# EAGLE board RFBoardLayoutGen0_v03.7_1_2 (EAGLE 9.4.1), part 1 of 2
AUTHOR: Kirchschlager Raimund
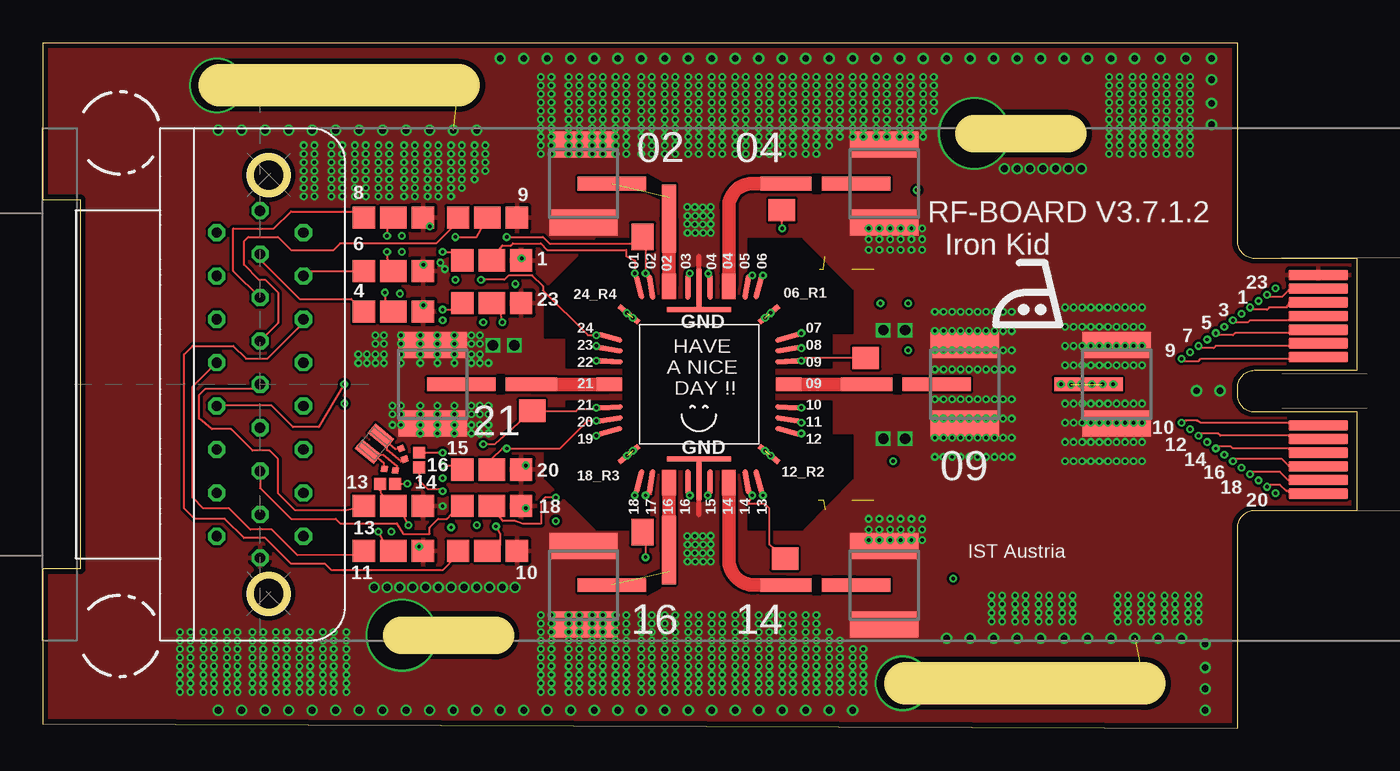
[diagram p0: board, top side]
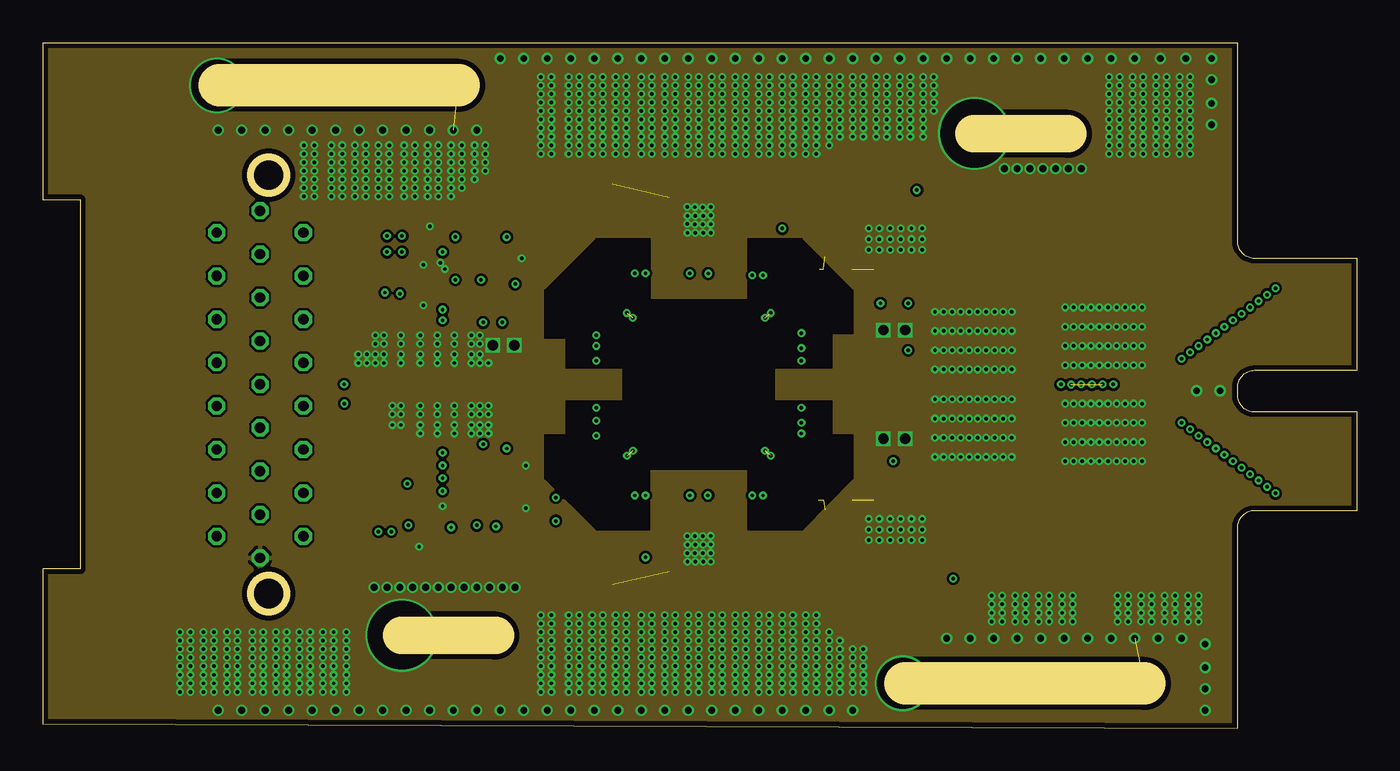
[diagram p1: board, inner layer Route2]
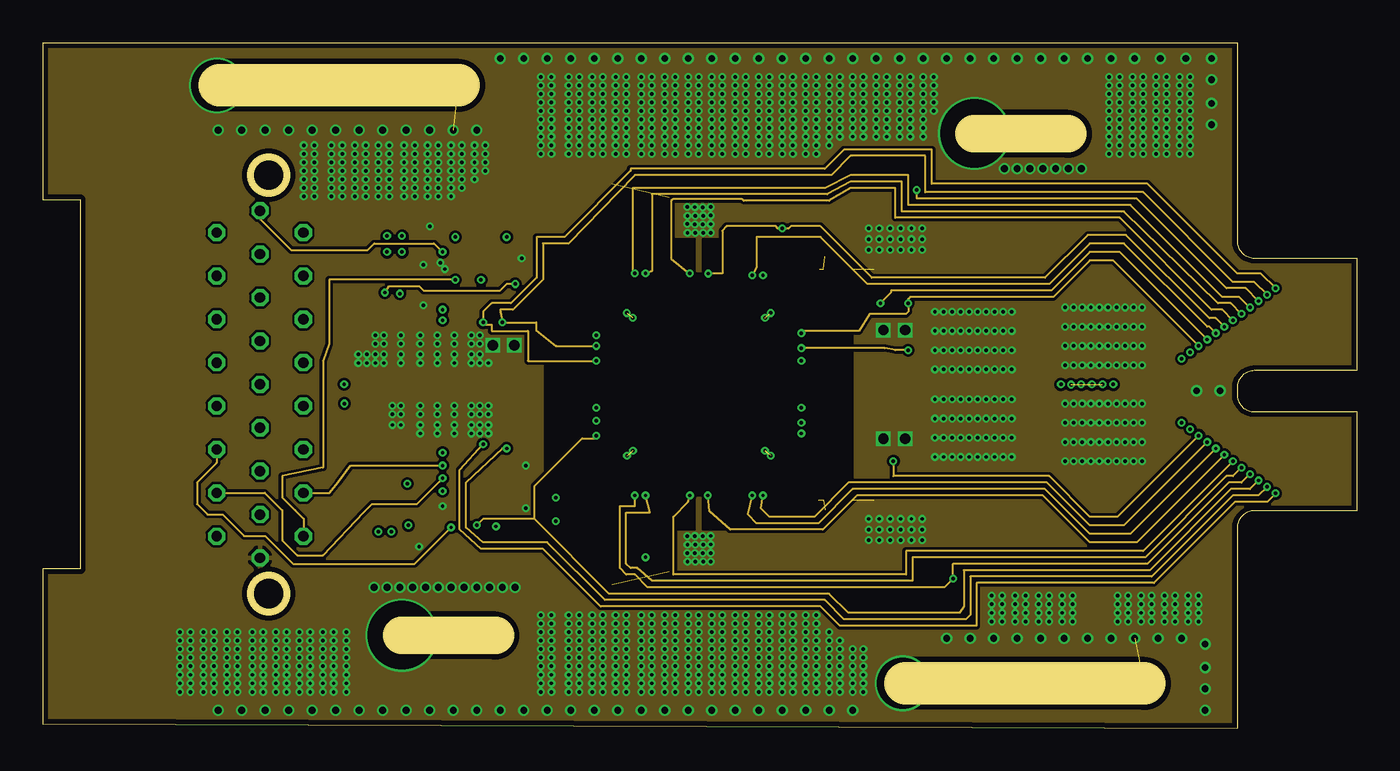
[diagram p2: board, inner layer Route3]
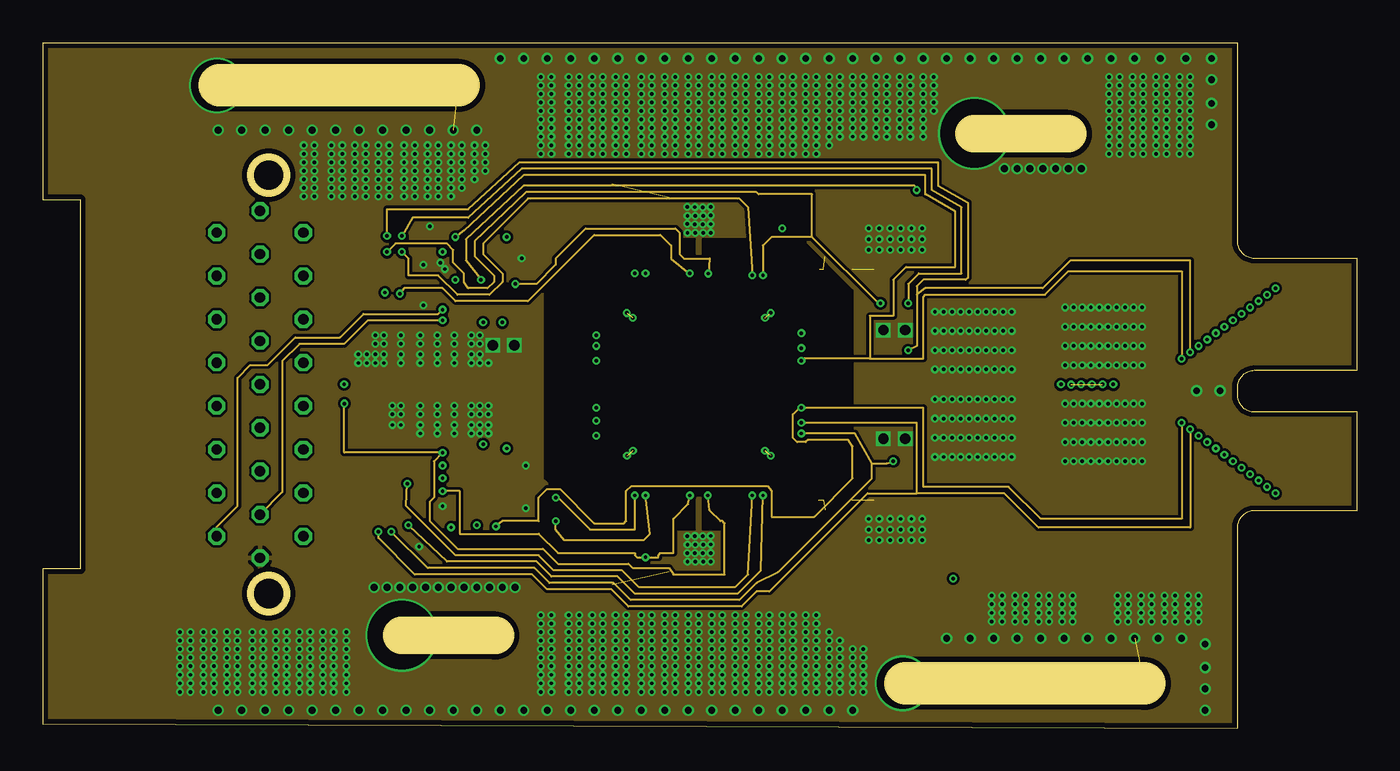
[diagram p3: board, inner layer Route14]
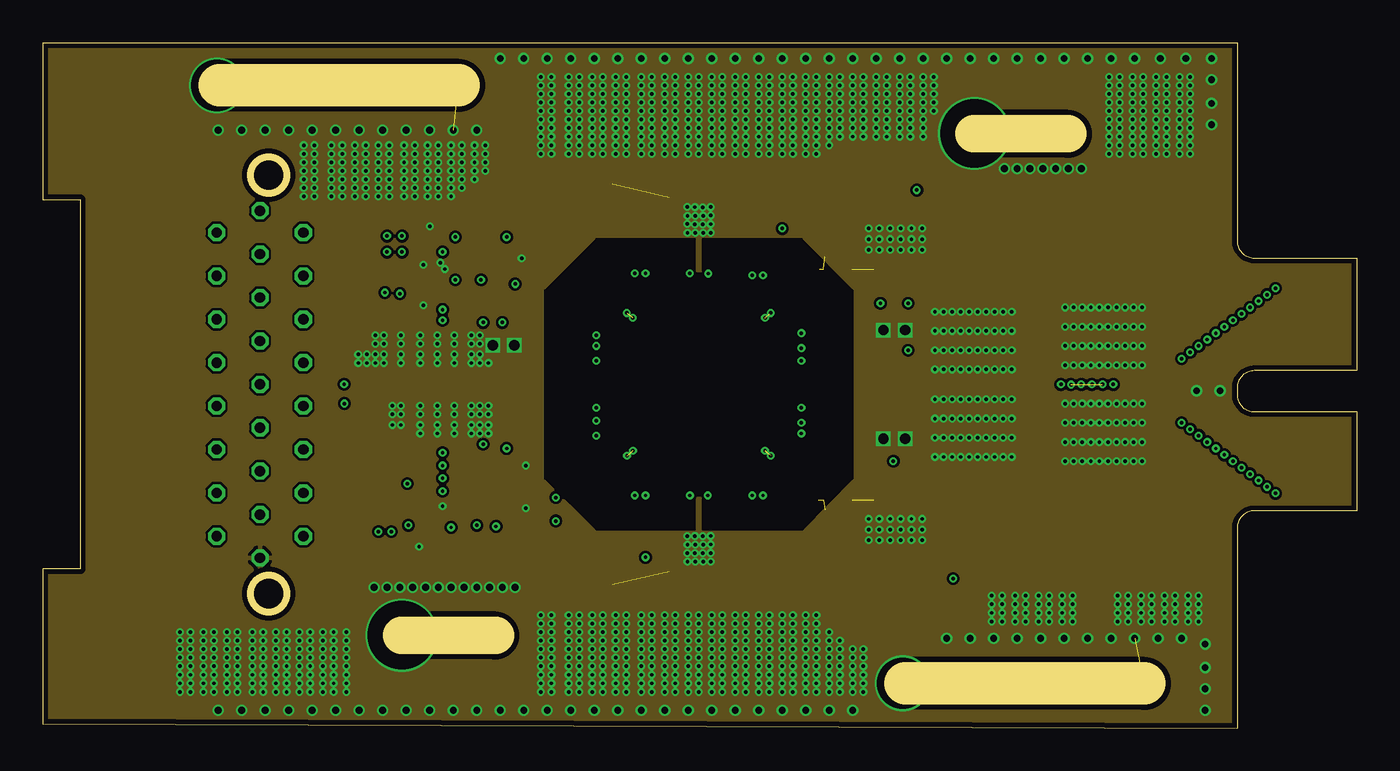
[diagram p4: board, inner layer Route15]
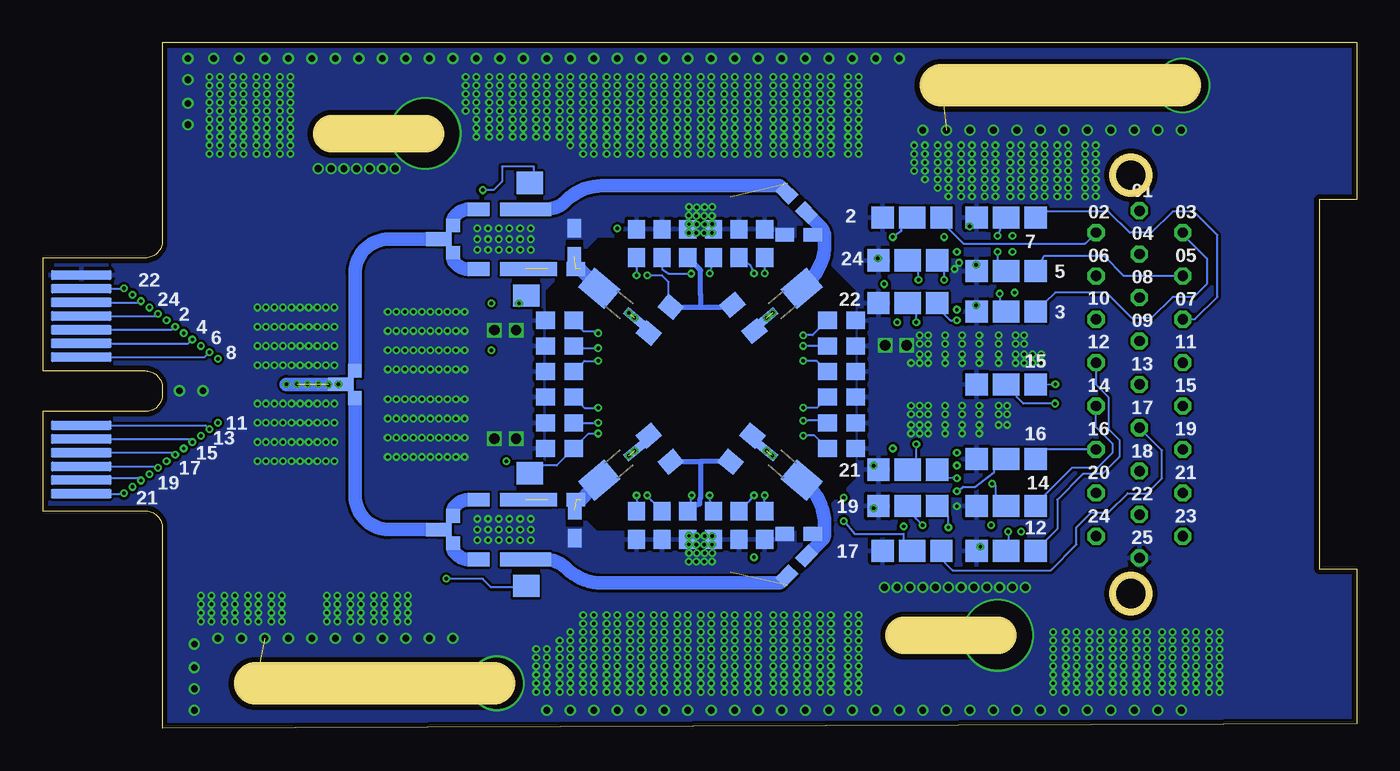
[diagram p5: board, bottom side, seen from below]

Size 76.9 x 40.12 mm. Coordinates in mm from the lower left corner, seen from the top.
Outline: 60,34.83 54.5,34.83
Outline: 24.35,37.62 10.35,37.62
Outline: 64.47,2.62 50.47,2.62
Outline: 26.5,5.43 21,5.43
Outline: 60,34.8 54.5,34.8
Outline: 0,40.12 0,30.93 2.2,30.93 2.2,9.32 0,9.32 0,0.25 69.9,0 69.9,11.72 arc-90 70.9,12.72 76.9,12.72 76.9,18.52 70.9,18.52 arc-90 69.9,19.52 69.9,19.93 arc-90 70.9,20.93 76.9,20.93 76.9,27.52 70.9,27.52 arc-90 69.9,28.52 69.9,40.12 0,40.12
Outline: circle at 13.22,7.88 radius 1.06
Outline: circle at 13.22,32.38 radius 1.06
Copper layers (1+2+3*14+15+16): Top 0.035mm / dielectric 0.4mm / Route2 0.035mm / dielectric 0.2mm / Route3 0.035mm / dielectric 0.2mm / Route14 0.035mm / dielectric 0.2mm / Route15 0.035mm / dielectric 0.4mm / Bottom 0.035mm
Design rules "PCB-POOL HighSpec_ML6+ *": minimum track width 0.125mm, minimum drill 0.2mm, track to track 0.125mm, track to pad 0.125mm, pad to pad 0.125mm, via to via 0.125mm, smd to smd 0.125mm, copper to edge 0.3mm, drill to drill 0.2mm, minimum pad ring 0.2mm, minimum via ring 0.125mm, stop-mask expansion 0.065mm, vias tented up to drill 0.3mm, thermal gap 0.2mm
Net classes: 0 GND: clearance 0.15 mm; 1 RF: width 0.8 mm, clearance 0.5 mm; 2 RF2: width 0.8 mm, clearance 0.2 mm
tRestrict: area 35.4,30.9 to 36.2,32.5; area 35.4,7.8 to 36.2,9.3; area 45.1,7.8 to 45.5,9; area 45.1,31.3 to 45.5,32.5; area 49.8,19.5 to 50.2,20.7; area 26.6,19.5 to 27,20.7

## Footprints (pad centres in the part's own frame; a part is rotated, then mirrored left to right if it is on the bottom)
BIAS_TEE_DOWN_0603_V02 = smd 1 x 0.8: HF 2.27,0 | smd 1.55 x 1.3: LF -0.05,1.55 | smd 4 x 0.8: OUT 1,0
BIAS_TEE_UP_0603 = smd 1.3 x 0.8: HF 3.25,0 | smd 1.55 x 1.3: LF 0.25,-1.55 | smd 3 x 0.8: OUT 0.5,0
BIAS_TEE_DOWN_0603 = smd 1.3 x 0.8: HF 3.25,0 | smd 1.55 x 1.3: LF 0.45,1.55 | smd 3 x 0.8: OUT 0.5,0
BIAS_TEE_UP_0603_V02 = smd 1 x 0.8: HF 2.27,0 | smd 1.55 x 1.3: LF -0.05,-1.55 | smd 4 x 0.8: OUT 1,0
25_SOCKET_M83513/13-D_V2 = drill 0.6 octagon: 01 10.16,0; 02 8.89,-2.54; 03 8.89,2.54; 04 7.62,0; 05 6.35,2.54; 06 6.35,-2.54; 07 3.81,2.54; 08 5.08,0; 09 2.54,0; 10 3.81,-2.54; 11 1.27,2.54; 12 1.27,-2.54; 13 0,0; 14 -1.27,-2.54; 15 -1.27,2.54; 16 -3.81,-2.54; 17 -2.54,0; 18 -5.08,0; 19 -3.81,2.54; 20 -6.35,-2.54; 21 -6.35,2.54; 22 -7.62,0; 23 -8.89,2.54; 24 -8.89,-2.54; 25 -10.16,0
L_MATCH = smd 2 x 1.5: IN 1.5,0 | smd 1.3 x 0.5: OUT -1.15,0
LP-FILTER/1_STAGE/OS/0603_TOP = smd 1.3 x 1.3: $1 -1.6,0.01; $6 1.85,0.01 | smd 1.55 x 1.3: $4 0.125,0.01
LP-FILTER/1_STAGE/OS/0603_BOTTOM = smd 1.3 x 1.3 bottom: $1 -1.6,0.01; $6 1.85,0.01 | smd 1.55 x 1.3 bottom: $4 0.125,0.01
SMP_STRAIGHT_MINI_WIDE = smd 0.8 x 4: 1 0,1.653 | smd 1.524 x 4: 2@1 -2.292,0; 2@2 2.292,0
TP07SQ = smd 0.7 x 0.7: TP 0,0
MEC8-113-02-L-D-RA1 = smd 0.6 x 3.5: 1 6.4,0.15; 3 5.6,0.15; 5 4.8,0.15; 7 4,0.15; 9 3.2,0.15; 11 2.4,0.15; 13 -1.6,0.15; 15 -2.4,0.15; 17 -3.2,0.15; 19 -4,0.15; 21 -4.8,0.15; 23 -5.6,0.15; 25 -6.4,0.15 | smd 0.6 x 3.5 bottom: 2 6.4,0.15; 4 5.6,0.15; 6 4.8,0.15; 8 4,0.15; 10 3.2,0.15; 12 2.4,0.15; 14 -1.6,0.15; 16 -2.4,0.15; 18 -3.2,0.15; 20 -4,0.15; 22 -4.8,0.15; 24 -5.6,0.15; 26 -6.4,0.15
RX-BR_V1 = smd 0.406 x 0.406 rotated 105: I$1 -0.02,1.08; U$1 0.63,1.23 | smd 0.406 x 0.406 rotated 165: I$2 1.08,-0.02; U$2 1.23,0.63 | smd 1.422 x 0.711 rotated 45: P$2 -0.02,-0.87; P$3 -0.87,-0.02
T_JUNCTION_0.3MM = smd 0.8 x 1.5 bottom: P$1 0,-0.81 | smd 0.8 x 0.8 bottom: P$2 -0.8,0.02; P$3 0.8,0.02 | smd 1 x 0.32 bottom: P$4 0,-0.22
24DC+10RF/400MU-PADS/0.7X0.7_V3.0 = smd 1.5 x 0.3 rotated 105: DC$01 -3.5,5.7 | smd 1.5 x 0.3 rotated 99: DC§02 -2.8,5.7 | smd 0.3 x 1.5: DC§03 -0.65,5.7; DC§04 0.65,5.7; DC§15 0.65,-5.7; DC§16 -0.65,-5.7 | smd 1.5 x 0.3 rotated 81: DC§05 2.8,5.7 | smd 1.5 x 0.3 rotated 75: DC§06 3.5,5.7 | smd 1.5 x 0.3 rotated 195: DC§07 5.2,2.75 | smd 1.5 x 0.3 rotated 189: DC§08 5.2,2.05 | smd 1.5 x 0.3 rotated 183: DC§09 5.2,1.35 | smd 1.5 x 0.3 rotated 177: DC§10 5.2,-1.35 | smd 1.5 x 0.3 rotated 171: DC§11 5.2,-2.05 | smd 1.5 x 0.3 rotated 165: DC§12 5.2,-2.75 | smd 1.5 x 0.3 rotated 285: DC§13 3.5,-5.7 | smd 1.5 x 0.3 rotated 279: DC§14 2.8,-5.7 | smd 1.5 x 0.3 rotated 261: DC§17 -2.8,-5.7 | smd 1.5 x 0.3 rotated 255: DC§18 -3.5,-5.7 | smd 1.5 x 0.3 rotated 15: DC§19 -5.2,-2.75 | smd 1.5 x 0.3 rotated 9: DC§20 -5.2,-2.05 | smd 1.5 x 0.3 rotated 3: DC§21 -5.2,-1.35 | smd 1.5 x 0.3 rotated 357: DC§22 -5.2,1.35 | smd 1.5 x 0.3 rotated 351: DC§23 -5.2,2.05 | smd 1.5 x 0.3 rotated 345: DC§24 -5.2,2.75 | smd 0.3 x 2: GND$1 0,5.75; GND$2 0,-5.75 | smd 1 x 0.3: GND$3 -1.375,4.375; GND$4 1.375,4.375; GND$5 1.375,-4.375; GND$6 -1.375,-4.375 | smd 3 x 0.3: GND$7 -0.105,4.375; GND$8 -0.105,-4.375 | smd 0.3 x 1: GND$9 0,-4.75; GND$10 0,4.75 | smd 0.8 x 1.5: RF$02_G1 -1.75,5.75; RF$04_G2 1.75,5.75; RF$14_G4 1.75,-5.75; RF$16_G5 -1.75,-5.75 | smd 1.5 x 0.3 rotated 40: RF$06_R1 4.1,4.1; RF$18_R3 -4.1,-4.1 | smd 1.5 x 0.8: RF$09_G3 5.25,0; RF$21_G6 -5.25,0 | smd 1.5 x 0.3 rotated 140: RF$12_R2 4.1,-4.1; RF$24_R4 -4.1,4.1
LP-FILTER/CAPACITOR/0603_BOTTOM = smd 1.1 x 0.8 bottom: IN -0.825,0; OUT 0.825,0
LP-FILTER/VARACTOR_V2 = smd 1 x 1.2 bottom: OUT 1,0; OUT1 -1,0
LP-FILTER/CAPACITOR/0603_BOTTOM_V2 = smd 1.1 x 1 bottom: IN -0.825,0; OUT 0.825,0

## Placement (x,y rotation side)
B$1  BIASTEEDOWN2  [BIAS_TEE_DOWN_0603_V02]  36.65,28.82 90 top
B$2  BIASTEEUP1  [BIAS_TEE_UP_0603]  43,31.88 0 top
B$3  BIASTEEDOWN1  [BIAS_TEE_DOWN_0603]  47.71,20.12 0 top
B$4  BIASTEEDOWN1  [BIAS_TEE_DOWN_0603]  43,8.38 0 top
B$5  BIASTEEUP2  [BIAS_TEE_UP_0603_V02]  36.65,11.43 270 top
B$6  BIASTEEDOWN1  [BIAS_TEE_DOWN_0603]  29.09,20.12 180 top
B$7  BIASTEEUP1  [BIAS_TEE_UP_0603]  48.15,30.38 180 bottom
B$8  BIASTEEDOWN1  [BIAS_TEE_DOWN_0603]  48.15,26.88 180 bottom
B$9  BIASTEEUP1  [BIAS_TEE_UP_0603]  48.15,13.38 180 bottom
B$10  BIASTEEDOWN1  [BIAS_TEE_DOWN_0603]  48.15,9.88 180 bottom
E$2  [25_SOCKET_M83513/13-D_V2]  12.71,20.12 90 top
L$1  L_MATCH  [L_MATCH]  33.62,24.77 40 bottom
L$2  L_MATCH  [L_MATCH]  43.17,24.77 140 bottom
L$3  L_MATCH  [L_MATCH]  43.17,15.47 220 bottom
L$4  L_MATCH  [L_MATCH]  33.63,15.47 320 bottom
LP$1  LP-FILTER/1-STAGETOP  [LP-FILTER/1_STAGE/OS/0603_TOP]  20.4,29.88 0 top
LP$2  LP-FILTER/1-STAGETOP  [LP-FILTER/1_STAGE/OS/0603_TOP]  20.4,26.75 0 top
LP$3  LP-FILTER/1-STAGETOP  [LP-FILTER/1_STAGE/OS/0603_TOP]  20.4,24.38 0 top
LP$4  LP-FILTER/1-STAGETOP  [LP-FILTER/1_STAGE/OS/0603_TOP]  20.4,20.12 180 bottom
LP$5  LP-FILTER/1-STAGETOP  [LP-FILTER/1_STAGE/OS/0603_TOP]  20.4,13 0 top
LP$6  LP-FILTER/1-STAGETOP  [LP-FILTER/1_STAGE/OS/0603_TOP]  20.4,10.38 0 top
LP$7  LP-FILTER/1-STAGEBOT  [LP-FILTER/1_STAGE/OS/0603_BOTTOM]  20.4,29.88 0 top
LP$8  LP-FILTER/1-STAGEBOT  [LP-FILTER/1_STAGE/OS/0603_BOTTOM]  20.4,26.75 0 top
LP$9  LP-FILTER/1-STAGEBOT  [LP-FILTER/1_STAGE/OS/0603_BOTTOM]  20.4,24.38 0 top
LP$10  LP-FILTER/1-STAGEBOT  [LP-FILTER/1_STAGE/OS/0603_BOTTOM]  25.9,29.88 0 top
LP$11  LP-FILTER/1-STAGEBOT  [LP-FILTER/1_STAGE/OS/0603_BOTTOM]  25.9,10.38 0 top
LP$12  LP-FILTER/1-STAGEBOT  [LP-FILTER/1_STAGE/OS/0603_BOTTOM]  20.4,15.75 0 top
LP$13  LP-FILTER/1-STAGEBOT  [LP-FILTER/1_STAGE/OS/0603_BOTTOM]  20.4,13 0 top
LP$14  LP-FILTER/1-STAGEBOT  [LP-FILTER/1_STAGE/OS/0603_BOTTOM]  20.4,10.38 0 top
LP$15  LP-FILTER/1-STAGETOP  [LP-FILTER/1_STAGE/OS/0603_TOP]  25.9,29.88 0 top
LP$16  LP-FILTER/1-STAGETOP  [LP-FILTER/1_STAGE/OS/0603_TOP]  26.15,27.38 0 top
LP$17  LP-FILTER/1-STAGETOP  [LP-FILTER/1_STAGE/OS/0603_TOP]  26.15,24.88 0 top
LP$18  LP-FILTER/1-STAGETOP  [LP-FILTER/1_STAGE/OS/0603_TOP]  26.15,15.12 0 top
LP$19  LP-FILTER/1-STAGETOP  [LP-FILTER/1_STAGE/OS/0603_TOP]  26.15,13 0 top
LP$20  LP-FILTER/1-STAGETOP  [LP-FILTER/1_STAGE/OS/0603_TOP]  25.9,10.38 0 top
LP$21  LP-FILTER/1-STAGEBOT  [LP-FILTER/1_STAGE/OS/0603_BOTTOM]  26.15,27.38 0 top
LP$22  LP-FILTER/1-STAGEBOT  [LP-FILTER/1_STAGE/OS/0603_BOTTOM]  26.15,24.88 0 top
LP$23  LP-FILTER/1-STAGEBOT  [LP-FILTER/1_STAGE/OS/0603_BOTTOM]  26.15,15.12 0 top
LP$24  LP-FILTER/1-STAGEBOT  [LP-FILTER/1_STAGE/OS/0603_BOTTOM]  26.15,13 0 top
S$1  MC-921WIDE  [SMP_STRAIGHT_MINI_WIDE]  22.84,20.12 270 top
S$2  MC-921WIDE  [SMP_STRAIGHT_MINI_WIDE]  31.65,8.38 270 top
S$3  MC-921WIDE  [SMP_STRAIGHT_MINI_WIDE]  49.25,8.38 90 top
S$4  MC-921WIDE  [SMP_STRAIGHT_MINI_WIDE]  53.96,20.12 90 top
S$5  MC-921WIDE  [SMP_STRAIGHT_MINI_WIDE]  62.85,20.12 90 top
S$6  MC-921WIDE  [SMP_STRAIGHT_MINI_WIDE]  49.25,31.88 90 top
S$7  MC-921WIDE  [SMP_STRAIGHT_MINI_WIDE]  31.65,31.88 270 top
TP1  TPTP07SQ  [TP07SQ]  22.02,16.12 0 top
TP2  TPTP07SQ  [TP07SQ]  22.02,15.25 0 top
TP3  TPTP07SQ  [TP07SQ]  20.62,14.31 0 top
TP4  TPTP07SQ  [TP07SQ]  19.74,14.31 90 top
U$1  MEC8-113-02-L-D-RA1MBRD  [MEC8-113-02-L-D-RA1]  74.5,20.12 270 top
U$2  TEMPSENS  [RX-BR_V1]  19.9,16.25 275.6 top
U$3  TJUNCTION  [T_JUNCTION_0.3MM]  52.9,28.62 90 top
U$4  TJUNCTION  [T_JUNCTION_0.3MM]  58.65,20.12 90 top
U$5  TJUNCTION  [T_JUNCTION_0.3MM]  52.9,11.62 90 top
U$6  24DC+10RF_V3.0  [24DC+10RF/400MU-PADS/0.7X0.7_V3.0]  38.4,20.12 0 top
U$7  LP-FILTER/CAPACITOR/0603THIN  [LP-FILTER/CAPACITOR/0603_BOTTOM]  32.65,28.88 0 top
U$8  LP-FILTER/CAPACITOR/0603THIN  [LP-FILTER/CAPACITOR/0603_BOTTOM]  32.65,11.38 0 top
U$9  LP-FILTER/CAPACITOR/0603THIN  [LP-FILTER/CAPACITOR/0603_BOTTOM]  45.77,11.94 270 top
U$10  LP-FILTER/CAPACITOR/0603THIN  [LP-FILTER/CAPACITOR/0603_BOTTOM]  45.79,28.44 90 top
U$11  LP-FILTER/VARACTOR_V2  [LP-FILTER/VARACTOR_V2]  36.01,16.36 130 top
U$12  LP-FILTER/VARACTOR_V2  [LP-FILTER/VARACTOR_V2]  40.79,16.36 50 top
U$13  LP-FILTER/VARACTOR_V2  [LP-FILTER/VARACTOR_V2]  40.79,23.89 310 top
U$14  LP-FILTER/VARACTOR_V2  [LP-FILTER/VARACTOR_V2]  35.89,24.02 230 top
U$15  LP-FILTER/CAPACITOR/0603NORMAL  [LP-FILTER/CAPACITOR/0603_BOTTOM_V2]  39.15,28.38 270 top
U$16  LP-FILTER/CAPACITOR/0603NORMAL  [LP-FILTER/CAPACITOR/0603_BOTTOM_V2]  39.15,11.88 90 top
U$17  LP-FILTER/CAPACITOR/0603THIN  [LP-FILTER/CAPACITOR/0603_BOTTOM]  32.77,30.75 45 top
U$18  LP-FILTER/CAPACITOR/0603THIN  [LP-FILTER/CAPACITOR/0603_BOTTOM]  32.77,9.5 315 top
U$19  LP-FILTER/CAPACITOR/0603THIN  [LP-FILTER/CAPACITOR/0603_BOTTOM]  46.52,26.88 0 top
U$20  LP-FILTER/CAPACITOR/0603THIN  [LP-FILTER/CAPACITOR/0603_BOTTOM]  46.52,13.38 0 top
U$21  LP-FILTER/CAPACITOR/0603NORMAL  [LP-FILTER/CAPACITOR/0603_BOTTOM_V2]  34.65,28.38 270 top
U$22  LP-FILTER/CAPACITOR/0603NORMAL  [LP-FILTER/CAPACITOR/0603_BOTTOM_V2]  36.15,28.38 270 top
U$23  LP-FILTER/CAPACITOR/0603NORMAL  [LP-FILTER/CAPACITOR/0603_BOTTOM_V2]  37.65,28.38 270 top
U$24  LP-FILTER/CAPACITOR/0603NORMAL  [LP-FILTER/CAPACITOR/0603_BOTTOM_V2]  40.65,28.38 270 top
U$26  LP-FILTER/CAPACITOR/0603NORMAL  [LP-FILTER/CAPACITOR/0603_BOTTOM_V2]  42.15,28.38 270 top
U$27  LP-FILTER/CAPACITOR/0603NORMAL  [LP-FILTER/CAPACITOR/0603_BOTTOM_V2]  46.65,23.88 180 top
U$28  LP-FILTER/CAPACITOR/0603NORMAL  [LP-FILTER/CAPACITOR/0603_BOTTOM_V2]  46.65,22.38 180 top
U$29  LP-FILTER/CAPACITOR/0603NORMAL  [LP-FILTER/CAPACITOR/0603_BOTTOM_V2]  46.65,20.88 180 top
U$30  LP-FILTER/CAPACITOR/0603NORMAL  [LP-FILTER/CAPACITOR/0603_BOTTOM_V2]  46.65,19.38 180 top
U$31  LP-FILTER/CAPACITOR/0603NORMAL  [LP-FILTER/CAPACITOR/0603_BOTTOM_V2]  46.65,17.88 180 top
U$32  LP-FILTER/CAPACITOR/0603NORMAL  [LP-FILTER/CAPACITOR/0603_BOTTOM_V2]  46.65,16.38 180 top
U$33  LP-FILTER/CAPACITOR/0603NORMAL  [LP-FILTER/CAPACITOR/0603_BOTTOM_V2]  42.15,11.88 90 top
U$34  LP-FILTER/CAPACITOR/0603NORMAL  [LP-FILTER/CAPACITOR/0603_BOTTOM_V2]  40.65,11.88 90 top
U$36  LP-FILTER/CAPACITOR/0603NORMAL  [LP-FILTER/CAPACITOR/0603_BOTTOM_V2]  37.65,11.88 90 top
U$37  LP-FILTER/CAPACITOR/0603NORMAL  [LP-FILTER/CAPACITOR/0603_BOTTOM_V2]  36.15,11.88 90 top
U$38  LP-FILTER/CAPACITOR/0603NORMAL  [LP-FILTER/CAPACITOR/0603_BOTTOM_V2]  34.65,11.88 90 top
U$39  LP-FILTER/CAPACITOR/0603NORMAL  [LP-FILTER/CAPACITOR/0603_BOTTOM_V2]  30.15,16.38 0 top
U$40  LP-FILTER/CAPACITOR/0603NORMAL  [LP-FILTER/CAPACITOR/0603_BOTTOM_V2]  30.15,17.88 0 top
U$41  LP-FILTER/CAPACITOR/0603NORMAL  [LP-FILTER/CAPACITOR/0603_BOTTOM_V2]  30.15,19.38 0 top
U$42  LP-FILTER/CAPACITOR/0603NORMAL  [LP-FILTER/CAPACITOR/0603_BOTTOM_V2]  30.15,20.88 0 top
U$43  LP-FILTER/CAPACITOR/0603NORMAL  [LP-FILTER/CAPACITOR/0603_BOTTOM_V2]  30.15,22.38 0 top
U$44  LP-FILTER/CAPACITOR/0603NORMAL  [LP-FILTER/CAPACITOR/0603_BOTTOM_V2]  30.15,23.88 0 top

## Library data of the parts
B$1-B$10 = Bias tee
E$2 = Glenair
L$1-L$4 = MatchCircuit
LP$1-LP$24 U$7-U$24 U$26-U$34 U$36-U$44 = LPFilter
S$1-S$7 = RF Connectors
TP1-TP4 = testpad
U$1 = MEC8-130-02-X-D-RA1
U$2 = TempSensors
U$3-U$5 = RF layout parts
U$6 = SampleArea

## Nets
C$1: E$2.01 LP$16.$1
C$2: E$2.02 LP$10.$1
C$3: E$2.03 LP$9.$1
C$4: E$2.04 LP$3.$1
C$5: E$2.05 LP$8.$1
C$6: E$2.06 LP$2.$1
C$7: E$2.07 LP$7.$1
C$8: E$2.08 LP$1.$1
C$9: E$2.09 LP$15.$1
C$10: E$2.10 LP$20.$1
C$11: E$2.11 LP$6.$1
C$12: E$2.12 LP$14.$1
C$13: E$2.13 LP$5.$1
C$14: E$2.14 LP$13.$1
C$15: E$2.15 LP$4.$1
C$16: E$2.16 LP$12.$1
C$17: E$2.17 LP$11.$1
C$18: E$2.18 LP$19.$1
C$19: E$2.19 LP$24.$1
C$20: E$2.20 LP$18.$1
C$21: E$2.21 LP$23.$1
C$22: E$2.22 LP$22.$1
C$23: E$2.23 LP$17.$1
C$24: E$2.24 LP$21.$1
D$1: LP$16.$4 U$1.21 U$6.DC$01 U$21.OUT
D$2: B$1.LF LP$10.$4 U$1.20 U$6.DC§02 U$22.OUT
D$3: LP$9.$4 U$1.19 U$6.DC§03 U$23.OUT
D$4: B$2.LF LP$3.$4 U$1.18 U$6.DC§04 U$24.OUT
D$5: LP$8.$4 U$1.17 U$6.DC§05 U$13.OUT1 U$14.OUT1 U$15.OUT
D$6: B$8.LF LP$2.$4 U$1.16 U$6.DC§06 U$26.OUT
D$7: LP$7.$4 U$1.15 U$6.DC§07 U$27.OUT
D$8: LP$1.$4 U$1.14 U$6.DC§08 U$28.OUT
D$9: B$3.LF LP$15.$4 U$1.13 U$6.DC§09 U$29.OUT
D$10: LP$20.$4 U$1.11 U$6.DC§10 U$30.OUT
D$11: LP$6.$4 U$1.12 U$6.DC§11 U$31.OUT
D$12: B$9.LF LP$14.$4 U$1.9 U$6.DC§12 U$32.OUT
D$13: LP$5.$4 TP4.TP U$1.10 U$6.DC§13 U$33.OUT
D$14: B$4.LF LP$13.$4 TP3.TP U$1.7 U$6.DC§14 U$34.OUT
D$15: LP$4.$4 TP1.TP U$1.8 U$6.DC§15 U$11.OUT1 U$12.OUT1 U$16.OUT
D$16: B$5.LF LP$12.$4 TP2.TP U$1.5 U$6.DC§16 U$36.OUT
D$17: LP$11.$4 U$1.6 U$6.DC§17 U$37.OUT
D$18: B$10.LF LP$19.$4 U$1.3 U$6.DC§18 U$38.OUT
D$19: LP$24.$4 U$1.4 U$6.DC§19 U$39.OUT
D$20: LP$18.$4 U$1.1 U$6.DC§20 U$40.OUT
D$21: B$6.LF LP$23.$4 U$1.2 U$6.DC§21 U$41.OUT
D$22: LP$22.$4 U$1.24 U$6.DC§22 U$42.OUT
D$23: LP$17.$4 U$1.23 U$6.DC§23 U$43.OUT
D$24: B$7.LF LP$21.$4 U$1.22 U$6.DC§24 U$44.OUT
GND: E$2.25 LP$1.$6 LP$2.$6 LP$3.$6 LP$4.$6 LP$5.$6 LP$6.$6 LP$7.$6 LP$8.$6 LP$9.$6 LP$10.$6 LP$11.$6 LP$12.$6 LP$13.$6 LP$14.$6 LP$15.$6 LP$16.$6 LP$17.$6 LP$18.$6 LP$19.$6 LP$20.$6 LP$21.$6 LP$22.$6 LP$23.$6 LP$24.$6 S$1.2@1 S$1.2@2 S$2.2@1 S$2.2@2 S$3.2@1 S$3.2@2 S$4.2@1 S$4.2@2 S$5.2@1 S$5.2@2 S$6.2@1 S$6.2@2 S$7.2@1 S$7.2@2 U$1.25 U$1.26 U$7.OUT U$8.OUT U$9.OUT U$10.OUT U$15.IN U$16.IN U$21.IN U$22.IN U$23.IN U$24.IN U$26.IN U$27.IN U$28.IN U$29.IN U$30.IN U$31.IN U$32.IN U$33.IN U$34.IN U$36.IN U$37.IN U$38.IN U$39.IN U$40.IN U$41.IN U$42.IN U$43.IN U$44.IN
N$1 [RF2]: B$6.HF S$1.1
N$2: L$3.OUT U$6.RF$12_R2 U$12.OUT
N$3 [RF2]: B$6.OUT U$6.RF$21_G6
N$4 [RF2]: B$5.OUT U$6.RF$16_G5
N$5 [RF2]: B$1.HF S$7.1
N$6 [RF2]: B$2.HF S$6.1
N$7 [RF2]: B$4.OUT U$6.RF$14_G4
N$8 [RF2]: B$3.OUT U$6.RF$09_G3
N$9 [RF]: L$4.OUT U$6.RF$18_R3 U$11.OUT
N$10 [RF]: L$1.OUT U$6.RF$24_R4 U$14.OUT
N$11 [RF]: L$2.OUT U$6.RF$06_R1 U$13.OUT
N$12 [RF2]: B$2.OUT U$6.RF$04_G2
N$13 [RF]: L$3.IN U$9.IN U$20.IN
N$14 [RF]: L$2.IN U$10.IN U$19.IN
N$15 [RF]: B$9.HF U$5.P$3
N$16 [RF2]: B$5.HF S$2.1
N$17 [RF2]: B$4.HF S$3.1
N$18 [RF2]: B$3.HF S$4.1
N$19 [RF]: B$7.HF U$3.P$3
N$20 [RF2]: B$1.OUT U$6.RF$02_G1
N$21 [RF]: S$5.1 U$4.P$1
N$22 [RF]: B$10.HF U$5.P$2
N$23 [RF]: B$8.HF U$3.P$2
N$24 [RF]: B$8.OUT U$19.OUT
N$25 [RF]: U$3.P$1 U$4.P$3
N$26 [RF]: U$4.P$2 U$5.P$1
N$27 [RF]: B$9.OUT U$20.OUT
RF$3 [RF]: L$4.IN U$8.IN U$18.IN
RF$4 [RF]: L$1.IN U$7.IN U$17.IN
RF$31 [RF]: B$10.OUT U$18.OUT
RF$41 [RF]: B$7.OUT U$17.OUT